# EAGLE board Lighthouse Sensor Carrier (EAGLE 9.6.2)
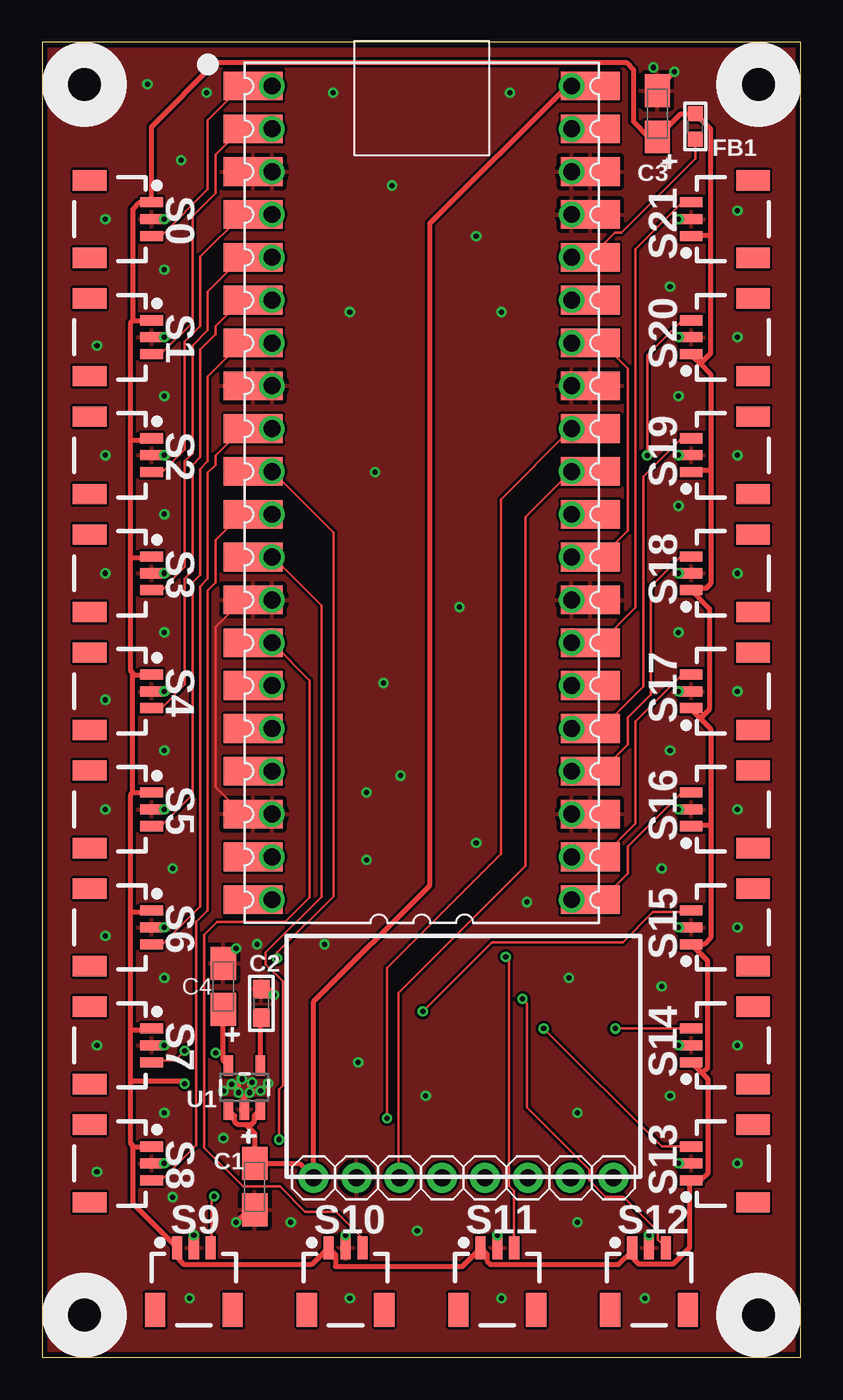
[diagram p0: board, top side]
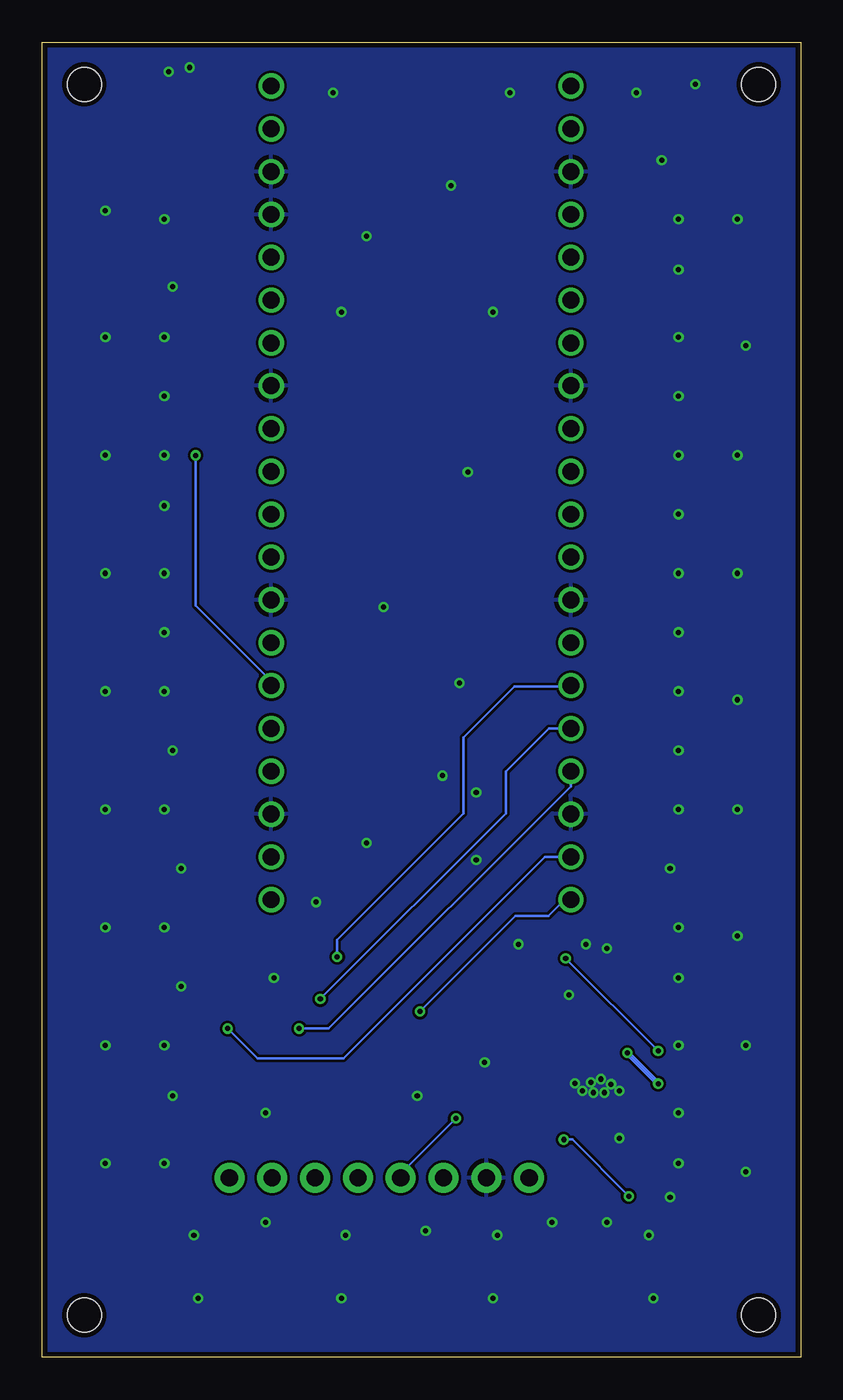
[diagram p1: board, bottom side, seen from below]

Size 45 x 78 mm. Coordinates in mm from the lower left corner, seen from the top.
Outline: 0,0 45,0 45,78 0,78 0,0
Copper layers (1*16): Top 0.035mm / dielectric 1.53mm / Bottom 0.035mm
Design rules "standard2layer": minimum track width 6mil, minimum drill 0.3mm, track to track 6mil, track to pad 6mil, pad to pad 6mil, via to via 6mil, smd to smd 0mil, copper to edge 12mil, drill to drill 12mil, minimum pad ring 6mil, minimum via ring 6mil, stop-mask expansion 4mil, vias tented up to drill 0.3mm, thermal gap 10mil
Net classes: 0 default: width 0.152 mm, drill 0.3 mm, clearance 0.152 mm; 1 POWER: width 0.305 mm, drill 0.3 mm, clearance 0.152 mm
Holes 2 mm at 2.5,75.5 2.5,2.5 42.5,75.5 42.5,2.5

## Footprints (pad centres in the part's own frame; a part is rotated, then mirrored left to right if it is on the bottom)
A/3216-18R = smd 1.95 x 1.5: + 1.375,0; - -1.375,0
0603 = smd 1.1 x 1: 1 -0.85,0; 2 0.85,0
R0603 = smd 0.9 x 0.9: 1 -0.75,0; 2 0.75,0
PICO-PKG-NO_DEBUG = drill 1: 1 -7.62,25.4; 2 -7.62,22.86; 3 -7.62,20.32; 4 -7.62,17.78; 5 -7.62,15.24; 6 -7.62,12.7; 7 -7.62,10.16; 8 -7.62,7.62; 9 -7.62,5.08; 10 -7.62,2.54; 11 -7.62,0; 12 -7.62,-2.54; 13 -7.62,-5.08; 14 -7.62,-7.62; 15 -7.62,-10.16; 16 -7.62,-12.7; 17 -7.62,-15.24; 18 -7.62,-17.78; 19 -7.62,-20.32; 20 -7.62,-22.86; 21 10.16,-22.86; 22 10.16,-20.32; 23 10.16,-17.78; 24 10.16,-15.24; 25 10.16,-12.7; 26 10.16,-10.16; 27 10.16,-7.62; 28 10.16,-5.08; 29 10.16,-2.54; 30 10.16,0; 31 10.16,2.54; 32 10.16,5.08; 33 10.16,7.62; 34 10.16,10.16; 35 10.16,12.7; 36 10.16,15.24; 37 10.16,17.78; 38 10.16,20.32; 39 10.16,22.86; 40 10.16,25.4 | smd 3.5 x 1.7: P$1 -8.73,25.4; P$2 -8.73,22.86; P$3 -8.73,20.32; P$4 -8.73,17.78; P$5 -8.73,15.24; P$6 -8.73,12.7; P$7 -8.73,10.16; P$8 -8.73,7.62; P$9 -8.73,5.08; P$10 -8.73,2.54; P$11 -8.73,0; P$12 -8.73,-2.54; P$13 -8.73,-5.08; P$14 -8.73,-7.62; P$15 -8.73,-10.16; P$16 -8.73,-12.7; P$17 -8.73,-15.24; P$18 -8.73,-17.78; P$19 -8.73,-20.32; P$20 -8.73,-22.86; P$21 11.27,-22.86; P$22 11.27,-20.32; P$23 11.27,-17.78; P$24 11.27,-15.24; P$25 11.27,-12.7; P$26 11.27,-10.16; P$27 11.27,-7.62; P$28 11.27,-5.08; P$29 11.27,-2.54; P$30 11.27,0; P$31 11.27,2.54; P$32 11.27,5.08; P$33 11.27,7.62; P$34 11.27,10.16; P$35 11.27,12.7; P$36 11.27,15.24; P$37 11.27,17.78; P$38 11.27,20.32; P$39 11.27,22.86; P$40 11.27,25.4
1X03_1MM_RA = smd 0.6 x 1.35: 1 -1,0; 2 0,0; 3 1,0 | smd 1.2 x 2: NC1 2.3,-3.675; NC2 -2.3,-3.675
SOT23-5 = smd 0.55 x 1.2: 1 -0.95,-1.3; 2 0,-1.3; 3 0.95,-1.3; 4 0.95,1.3; 5 -0.95,1.3
MPU6050 = drill 1.016 pad 1.778: AD0 -6.35,6.85; GND 6.35,6.85; INT -8.89,6.85; SCL 3.81,6.85; SDA 1.27,6.85; VDD 8.89,6.85; XCL -3.81,6.85; XDA -1.27,6.85

## Placement (x,y rotation side)
C1  10u  [A/3216-18R]  12.61,10.12 90 top
C2  10n  [0603]  13,21 90 top
C3  10u  [A/3216-18R]  36.5,73.75 270 top
C4  10u  [A/3216-18R]  10.75,22 270 top
FB1  600  [R0603]  38.75,73 90 top
P1  [PICO-PKG-NO_DEBUG]  21.25,50 0 top
S0  SH1.0_1X3  [1X03_1MM_RA]  6.5,67.5 270 top
S1  SH1.0_1X3  [1X03_1MM_RA]  6.5,60.5 270 top
S2  SH1.0_1X3  [1X03_1MM_RA]  6.5,53.5 270 top
S3  SH1.0_1X3  [1X03_1MM_RA]  6.5,46.5 270 top
S4  SH1.0_1X3  [1X03_1MM_RA]  6.5,39.5 270 top
S5  SH1.0_1X3  [1X03_1MM_RA]  6.5,32.5 270 top
S6  SH1.0_1X3  [1X03_1MM_RA]  6.5,25.5 270 top
S7  SH1.0_1X3  [1X03_1MM_RA]  6.5,18.5 270 top
S8  SH1.0_1X3  [1X03_1MM_RA]  6.5,11.5 270 top
S9  SH1.0_1X3  [1X03_1MM_RA]  9,6.5 0 top
S10  SH1.0_1X3  [1X03_1MM_RA]  18,6.5 0 top
S11  SH1.0_1X3  [1X03_1MM_RA]  27,6.5 0 top
S12  SH1.0_1X3  [1X03_1MM_RA]  36,6.5 0 top
S13  SH1.0_1X3  [1X03_1MM_RA]  38.5,11.5 90 top
S14  SH1.0_1X3  [1X03_1MM_RA]  38.5,18.5 90 top
S15  SH1.0_1X3  [1X03_1MM_RA]  38.5,25.5 90 top
S16  SH1.0_1X3  [1X03_1MM_RA]  38.5,32.5 90 top
S17  SH1.0_1X3  [1X03_1MM_RA]  38.5,39.5 90 top
S18  SH1.0_1X3  [1X03_1MM_RA]  38.5,46.5 90 top
S19  SH1.0_1X3  [1X03_1MM_RA]  38.5,53.5 90 top
S20  SH1.0_1X3  [1X03_1MM_RA]  38.5,60.5 90 top
S21  SH1.0_1X3  [1X03_1MM_RA]  38.5,67.5 90 top
U1  SPX3819-3.3V  [SOT23-5]  12,16 0 top
U$1  MPU6050BREAKOUT  [MPU6050]  25,17.5 180 top

## Library data of the parts
C1 C3 C4 = Anran_adafruit
C2 FB1 = Anran_microbuilder
P1 = RpiPico
S0 S1-S21 = customCON; SPICEPREFIX: J
U1 = SparkFun
U$1 = breakoutbrds

## Nets
3V3 [POWER]: C3.+ C4.+ FB1.2 S0.1 S1.1 S2.1 S3.1 S4.1 S5.1 S6.1 S7.1 S8.1 S9.1 S10.1 S11.1 S12.1 S13.1 S14.1 S15.1 S16.1 S17.1 S18.1 S19.1 S20.1 S21.1 U1.5
5V [POWER]: C1.+ P1.40 P1.P$40 U1.1 U1.3 U$1.VDD
GND: C1.- C2.2 C3.- C4.- P1.3 P1.8 P1.13 P1.18 P1.23 P1.28 P1.33 P1.37 P1.38 P1.P$3 P1.P$8 P1.P$13 P1.P$18 P1.P$23 P1.P$28 P1.P$33 P1.P$37 P1.P$38 S0.2 S1.2 S2.2 S3.2 S4.2 S5.2 S6.2 S7.2 S8.2 S9.2 S10.2 S11.2 S12.2 S13.2 S14.2 S15.2 S16.2 S17.2 S18.2 S19.2 S20.2 S21.2 U1.2 U$1.GND
N$1: C2.1 U1.4
N$2: FB1.1 P1.36 P1.P$36
N$23: P1.29 P1.34 P1.P$29 P1.P$34
S0: P1.1 P1.P$1 S0.3
S1: P1.2 P1.P$2 S1.3
S2: P1.4 P1.P$4 S2.3
S3: P1.5 P1.P$5 S3.3
S4: P1.6 P1.P$6 S4.3
S5: P1.7 P1.P$7 S5.3
S6: P1.9 P1.P$9 S6.3
S7: P1.10 P1.P$10 S7.3
S8: P1.11 P1.P$11 S8.3
S9: P1.12 P1.P$12 S9.3
S10: P1.14 P1.P$14 S10.3
S11: P1.15 P1.P$15 S11.3
S12: P1.16 P1.P$16 S12.3
S13: P1.17 P1.P$17 S13.3
S14: P1.19 P1.P$19 S14.3
S15: P1.20 P1.P$20 S15.3
S16: P1.21 P1.P$21 S16.3
S17: P1.22 P1.P$22 S17.3
S18: P1.24 P1.P$24 S18.3
S19: P1.25 P1.P$25 S19.3
S20: P1.26 P1.P$26 S20.3
S21: P1.27 P1.P$27 S21.3
SCL: P1.32 P1.P$32 U$1.SDA
SDA: P1.31 P1.P$31 U$1.SCL
VSYS: P1.39 P1.P$39

## Tracks (layer width: path | path; a pad name or v marks a point on that pad's centre or on a via)
3V3  (via drill 0.3)
  Top 0.305: U1.5 10.75,17.6 10.75,18.06 | 10.75,18.06 C4.+ | 5.37,12.46 6.4,12.46 S8.1 | 5.26,19.43 6.4,19.43 S7.1 | 5.26,16.37 5.26,12.69 5.37,12.57 5.37,12.46 | 5.26,16.37 5.26,19.43 | 5.26,26.4 6.4,26.4 S6.1 | 5.37,33.49 6.4,33.49 S5.1 | 5.37,40.46 6.4,40.46 S4.1 | 5.26,47.43 6.4,47.43 S3.1 | 5.37,40.46 5.37,40.58 5.26,40.69 5.26,47.43 | 5.26,54.41 6.4,54.41 S2.1 | 5.37,61.49 6.4,61.49 S1.1 | v10.29,18.06 10.75,18.06 | 5.26,16.37 8.31,16.37 v8.46,16.23 | 26.06,6.51 S11.1 26.39,6.11 26.39,5.7 26.59,5.51 34.19,5.51 35.09,6.41 | 39.15,16.86 38.52,17.49 S14.1 | 39.66,31.55 38.52,31.55 S16.1 | 39.66,66.52 38.52,66.52 S21.1 | 39.66,52.58 38.52,52.58 S19.1 | 39.03,58.92 38.52,59.44 S20.1 | 26.06,6.51 24.94,5.39 17.39,5.39 17.39,6.11 S10.1 16.02,5.52 8.39,5.52 8.12,5.8 8.12,6.38 S9.1 5.37,9.13 5.37,12.46 | S12.1 35.09,6.41 | 26.06,6.97 26.06,6.51 | 39.15,16.86 39.48,16.53 39.48,10.89 39.1,10.52 38.52,10.52 S13.1 38.41,10.4 38.41,6.5 37.43,5.52 35.39,5.52 35.09,5.82 35.09,6.41 | 39.15,16.86 39.48,17.19 39.48,23.52 S15.1 39.27,24.5 39.66,24.89 39.66,31.55 | 39.03,37.89 39.66,37.26 39.66,31.55 | 39.03,37.89 39.61,38.46 39.61,44.39 S18.1 38.61,45.61 39.38,45.61 39.66,45.89 39.66,52.58 | 39.03,58.92 39.66,58.29 39.66,52.58 | 39.03,58.92 39.66,59.55 39.66,66.52 | S17.1 38.5,38.42 39.03,37.89 | 5.26,19.43 5.26,26.4 | 5.37,33.49 5.26,33.38 5.26,26.4 | 5.37,33.49 5.37,40.46 | 5.26,47.43 5.26,54.41 | 5.37,61.49 5.26,61.38 5.26,54.41 | 5.37,61.49 5.37,68.11 5.73,68.47 6.47,68.47 S0.1 6.5,73 10.3,76.81 34.65,76.81 35.08,76.38 35.08,73.3 36,72.38 C3.+ 37.88,73.75 FB1.2 39.66,72.84 39.66,66.52
  Bottom 0.305: v8.46,16.23 v10.29,18.06
5V
  Top 0.305: C1.+ 15.27,11.49 U$1.VDD 16.11,21.11 23,28 23,67.25 31.15,75.4 P1.40 31.55,75.44 32.46,75.44 P1.P$40 | 12.61,12.28 C1.+ | 12.1,13.79 12.4,13.79 12.58,13.97 12.58,14.33 U1.3 | 12.1,13.79 11.6,13.79 11.42,13.97 11.42,14.33 U1.1 | 12.1,13.79 12.61,13.29 C1.+
GND  (via drill 0.3)
  Top 0.152: P1.18 13.6,32.23 12.57,32.23 P1.P$18 12.46,32.23 11.89,32.23 10.29,33.83 10.29,43.32 11.89,44.92 12.46,44.92 P1.P$13 | P1.P$23 32.46,32.23 31.43,32.23 P1.23 | P1.P$8 12.57,57.61 13.6,57.61 P1.8 | P1.P$28 32.46,44.92 31.43,44.92 P1.28 | P1.P$3 12.57,70.29 13.6,70.29 P1.3 | P1.P$33 32.46,57.61 31.43,57.61 P1.33 | P1.P$37 32.46,67.78 31.43,67.78 P1.37 | P1.P$38 32.46,70.29 31.43,70.29 P1.38
  Top 0.305: S0.2 v7.25,67.5 | S1.2 v7.25,60.5 | S2.2 v7.25,53.5 | S3.2 v7.25,46.5 | S4.2 v7.25,39.5 | S5.2 v7.25,32.5 | S6.2 v7.25,25.5 | S7.2 v7.25,18.5 | S8.2 v7.25,11.5 | S9.2 v9,7.25 | S10.2 v18,7.25 | S11.2 v27,7.25 | S12.2 v36,7.25 | S13.2 v37.75,11.5 | S14.2 v37.75,18.5 | S15.2 v37.75,25.5 | S16.2 v37.75,32.5 | S17.2 v37.75,39.5 | S18.2 v37.75,46.5 | S19.2 v37.75,53.5 | S20.2 v37.75,60.5 | S21.2 v37.75,67.5 | U1.2 12,15.35 11.88,15.47 | 11.88,15.47 v11.65,15.7 | v10.75,15.8 11.15,16.2 v11.25,16.2 11.65,15.8 v11.65,15.7 | v11.65,15.7 11.65,16.3 v11.85,16.5 | v12.3,15.7 12.07,15.47 11.88,15.47 | v12.45,16.3 12.3,16.15 v12.3,15.7 | v12.3,15.7 12.4,15.8 v12.95,15.8 v13.4,16.25 | v13.75,21.5 13.4,21.85 C2.2 | C1.- 12.24,8.74 v11.5,8 | C3.- 36.5,75.25 v37.5,76.25 | v11.5,24.25 11.5,24.12 C4.-
  other vias: 3.25,18.5 3.25,11 8.75,3.5 18.25,3.5 27.25,3.5 35.75,3.5 41.25,11.5 41.25,18.5 41.25,25.5 41.25,32.5 41.25,39.5 41.25,46.5 41.25,53.5 41.25,60.5 41.25,68 3.75,67.5 3.25,60 3.75,53.5 3.75,46.5 3.75,39 3.75,32.5 3.75,25 9.75,75 8.25,71 6.25,75.5 36.25,76.5 27.75,75 17.25,75 20.75,69.5 25.75,66.5 18.25,62 27.25,62 37.25,63.5 37.75,57 37.75,50.5 37.75,43 37.25,36 36.75,29 28.75,27 25.75,30.5 36.75,22 31.25,22.5 37.25,15.5 31.75,14.5 31.75,8 22.25,7.5 22.75,15.5 18.75,17.5 7.25,14.5 7.75,9.5 14.75,8 10.75,13 12.75,24.5 7.25,22.5 7.75,29 16.75,24.5 21.25,34.5 19.25,33.5 19.25,29.5 20.25,40 7.25,36 7.25,43 7.25,50 7.25,57 7.25,64.5 19.75,52.5 24.75,44.5
  pour Bottom: -2,80 47,80 47,-2 -2,-2
  pour Top: -1,79 46,79 46,-1 -1,-1
N$1
  Top 0.305: U1.4 12.95,20.1 C2.1
N$2
  Top 0.152: P1.36 31.43,65.27 32.46,65.27 P1.P$36 33.98,66.7 34.37,66.7 38.75,71.09 FB1.1
  Top 0.305: P1.P$36 33.01,65.24
N$23
  Top 0.152: P1.29 31.43,47.55 32.46,47.55 P1.P$29 32.58,47.55 33.26,47.55 34.75,49.03 34.75,58.64 33.26,60.12 32.58,60.12 P1.P$34 32.46,60.24 31.43,60.24 P1.34
S0
  Top 0.152: S0.3 6.51,66.52 7.09,66.52 9.83,69.27 9.83,73.38 11.77,75.32 12.46,75.32 P1.P$1 12.57,75.44 13.6,75.44 P1.1
S1
  Top 0.152: S1.3 6.51,59.55 7.09,59.55 8.91,61.38 8.91,67.67 10.29,69.04 10.29,71.32 11.77,72.81 12.46,72.81 P1.P$2 12.57,72.92 13.6,72.92 P1.2
S2
  Top 0.152: S2.3 6.51,52.58 7.2,52.58 8.46,53.84 8.46,60.24 9.37,61.15 9.37,65.27 11.89,67.78 12.46,67.78 P1.P$4 12.57,67.78 13.6,67.78 P1.4
S3
  Top 0.152: S3.3 6.51,45.61 7.2,45.61 8.46,46.86 8.46,53.15 8.91,53.61 8.91,60.01 9.83,60.92 9.83,63.21 11.77,65.15 12.46,65.15 P1.P$5 12.57,65.27 13.6,65.27 P1.5
S4
  Top 0.152: S4.3 6.51,38.52 7.09,38.52 8.46,39.89 8.46,46.18 8.91,46.63 8.91,52.92 9.37,53.38 9.37,59.78 10.29,60.69 10.29,61.15 11.77,62.64 12.46,62.64 P1.P$6 12.57,62.75 13.6,62.75 P1.6
S5
  Top 0.152: S5.3 6.51,31.55 7.09,31.55 8.91,33.38 8.91,45.95 9.37,46.41 9.37,52.69 9.83,53.15 9.83,58.18 11.77,60.12 12.46,60.12 P1.P$7 12.57,60.24 13.6,60.24 P1.7
S6
  Top 0.152: S6.3 6.51,24.57 7.2,24.57 9.37,26.75 9.37,45.72 9.83,46.18 9.83,52.46 10.29,52.92 10.29,53.49 11.77,54.98 12.46,54.98 P1.P$9 12.57,55.09 13.6,55.09 P1.9
S7  (via drill 0.3)
  Top 0.152: v8.46,18.17 7.89,17.6 6.51,17.6 S7.3 | v13.95,23.66 13.95,24 17.27,27.33 17.27,48.91 13.72,52.46 P1.P$10 13.6,52.46 P1.10
  Bottom 0.152: v13.95,23.66 v8.46,18.17
S8
  Top 0.152: S8.3 6.51,10.52 7.09,10.52 9.14,12.57 9.14,25.83 9.83,26.52 9.83,45.49 10.29,45.95 10.29,48.46 11.77,49.95 12.46,49.95 P1.P$11 12.57,50.06 13.6,50.06 P1.11
S9  (via drill 0.3)
  Top 0.152: v10.2,9.56 10.06,9.41 10.06,6.51 S9.3 | v14.06,12.92 14.06,15.89 14.29,16.12 14.29,22.29 13.26,23.32 13.26,24 16.57,27.31 16.57,44.58 13.72,47.43 P1.P$12 13.6,47.43 P1.12
  Bottom 0.152: v14.06,12.92 13.56,12.92 v10.2,9.56
S10
  Top 0.152: S10.3 18.97,6.51 18.97,7.09 17.44,8.62 15.61,8.62 14.1,10.13 11.91,10.13 9.6,12.44 9.6,25.05 10.39,25.83 14.4,25.83 15.86,27.29 15.86,40.15 13.72,42.29 P1.P$14 13.6,42.29 P1.14
S11  (via drill 0.3)
  Top 0.152: P1.P$15 12.57,39.89 13.6,39.89 P1.15 | 27.89,5.89 27.89,6.39 S11.3 28,9.88 27.69,10.19 27.69,23.56 v27.5,23.75
  Bottom 0.152: 13.6,39.78 13.03,39.78 | 13.6,39.78 P1.15 | v27.5,23.75 27.5,24.75 20,32.25 20,36.75 16.97,39.78 13.6,39.78
S12  (via drill 0.3)
  Top 0.152: 36.92,6.51 S12.3 36.53,6.97 36.53,7.47 34.47,9.53 33.43,9.53 32.47,10.49 32.47,11.11 28.75,14.83 28.75,21 v28.5,21.25 | P1.P$16 12.57,37.38 13.6,37.38 P1.16
  Bottom 0.152: 13.72,37.03 13.72,37.26 P1.16 14.95,37.3 17.5,34.75 17.5,32.25 v28.5,21.25
S13  (via drill 0.3)
  Top 0.152: 38.41,12.57 S13.3 36.75,12.5 v29.75,19.5 | P1.P$17 12.57,34.75 13.6,34.75 P1.17
  Bottom 0.152: 13.72,34.86 13.68,34.81 P1.17 13.63,33.87 28,19.5 v29.75,19.5
S14  (via drill 0.3)
  Top 0.152: P1.P$19 12.57,29.72 13.6,29.72 P1.19 | S14.3 38.45,19.5 38.41,19.55 38.45,19.55 S14.3 | S14.3 38,19.5 | S14.3 v34,19.5
  Bottom 0.152: 13.95,29.6 13.72,29.6 P1.19 15.16,29.68 27.12,17.72 32.22,17.72 v34,19.5
S15  (via drill 0.3)
  Top 0.152: v22.58,20.51 26.69,24.62 34.44,24.62 36.23,26.4 38.41,26.4 S15.3 | P1.P$20 12.57,27.2 13.6,27.2 P1.20
  Bottom 0.152: v22.58,20.51 16.92,26.18 14.97,26.18 14.06,27.09 13.72,27.09 P1.20
S16
  Top 0.152: S16.3 38.41,33.49 37.95,33.49 34.75,30.29 34.75,28.69 33.26,27.2 32.58,27.2 P1.P$21 32.46,27.2 31.43,27.2 P1.21
S17
  Top 0.152: S17.3 38.41,40.46 37.95,40.46 35.2,37.72 35.2,31.66 33.26,29.72 32.58,29.72 P1.P$22 32.46,29.72 31.43,29.72 P1.22
S18
  Top 0.152: S18.3 38.41,47.43 37.83,47.43 36.12,45.72 36.12,39.32 34.75,37.95 34.75,36.35 33.26,34.86 32.58,34.86 P1.P$24 32.46,34.75 31.43,34.75 P1.24
S19
  Top 0.152: S19.3 38.41,54.41 37.83,54.41 35.66,52.23 35.66,39.78 33.26,37.38 32.58,37.38 P1.P$25 32.46,37.38 31.43,37.38 P1.25
S20  (via drill 0.3)
  Top 0.152: v35.89,53.49 35.89,59.44 37.95,61.49 38.41,61.49 S20.3 | P1.P$26 32.46,39.89 31.43,39.89 P1.26
  Bottom 0.152: v35.89,53.49 35.89,44.58 31.43,40.12 31.43,39.89 P1.26
S21
  Top 0.152: S21.3 38.41,68.47 37.95,68.47 35.2,65.72 35.2,44.46 33.15,42.41 32.58,42.41 P1.P$27 32.46,42.41 31.43,42.41 P1.27
SCL  (via drill 0.3)
  Top 0.152: P1.P$32 32.46,55.09 31.43,55.09 P1.32 31.32,54.98 27.22,50.88 27.22,29.86 20.46,23.1 v20.46,14.17
  Bottom 0.152: v20.46,14.17 23.66,10.97 23.66,10.74 U$1.SDA
SDA
  Top 0.152: P1.P$31 32.46,52.58 31.43,52.58 P1.31 31.32,52.46 28.68,49.82 28.68,29.13 21.14,21.6 21.14,10.74 U$1.SCL
VSYS
  Top 0.152: P1.39 31.43,72.92 32.46,72.92 P1.P$39

## Text on the board
tNames: + | + | +